# Altium PCB PCB_PI3_v0.1.PcbDoc
Units mm, origin at the board's own origin, x right, y up, seen from the top; angles counter-clockwise.
Board outline 210 x 100 mm, 2 copper layers (Top Layer, Bottom Layer); 65 components, 64 nets, 276 pads, 2 vias.
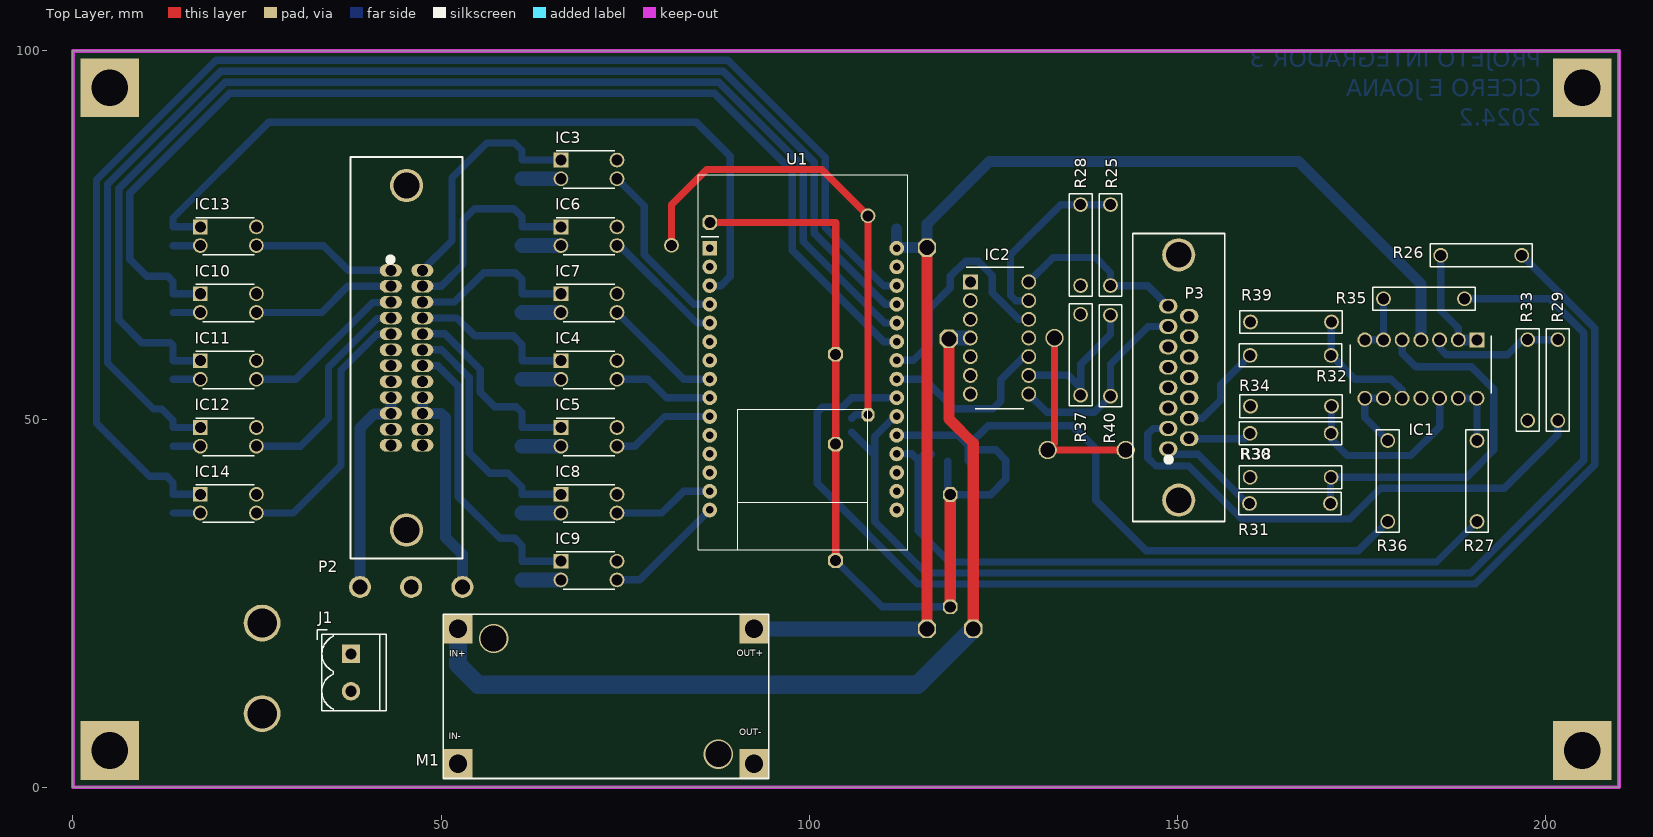
[diagram p0: Top Layer view]
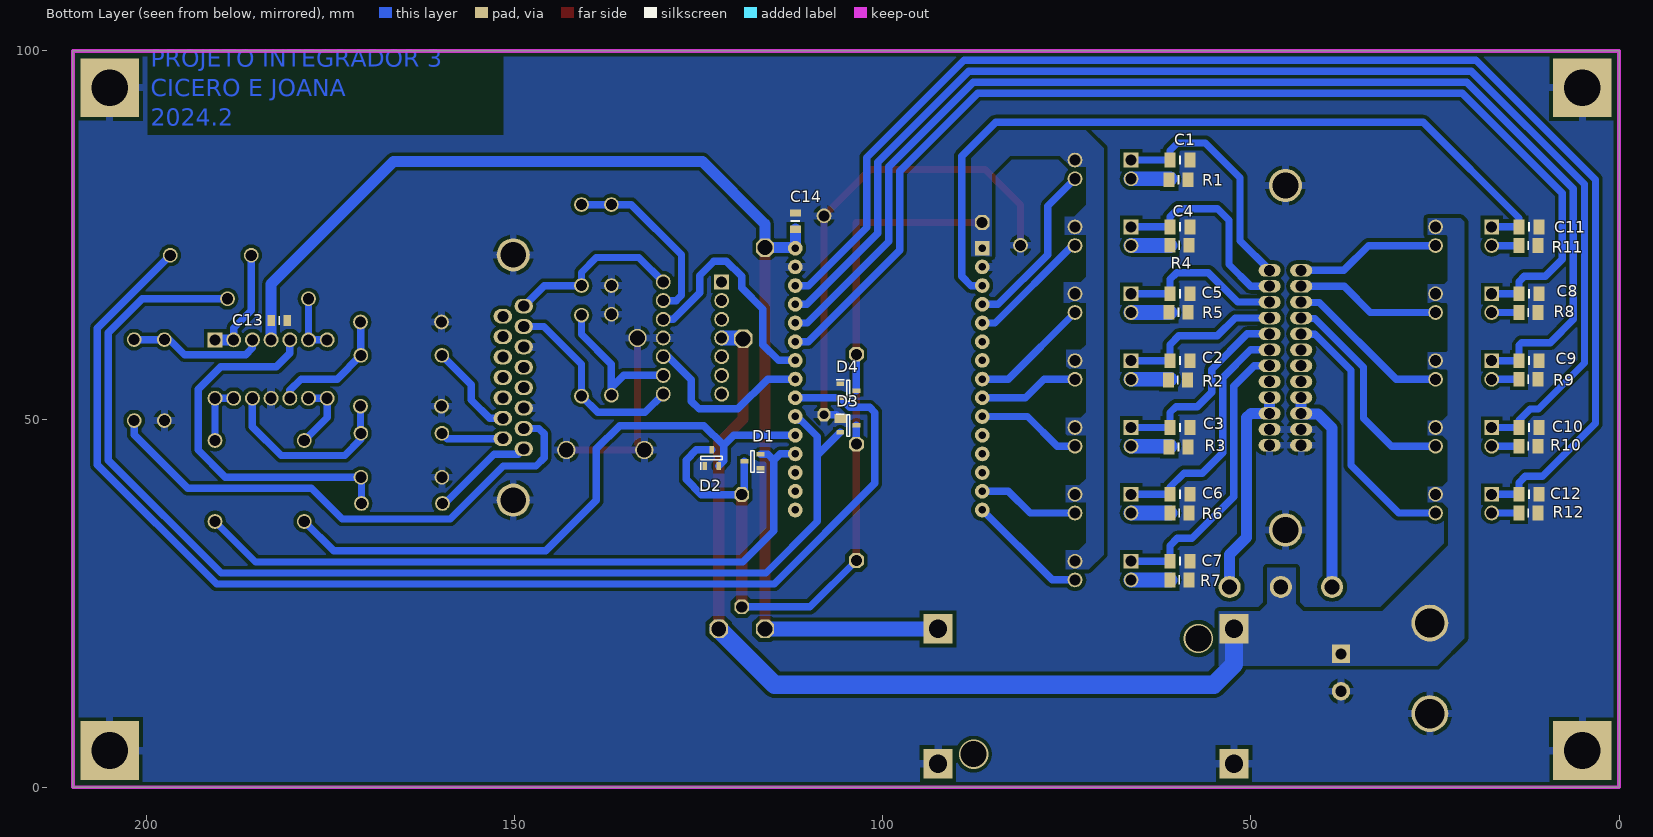
[diagram p1: Bottom Layer view, seen from below]
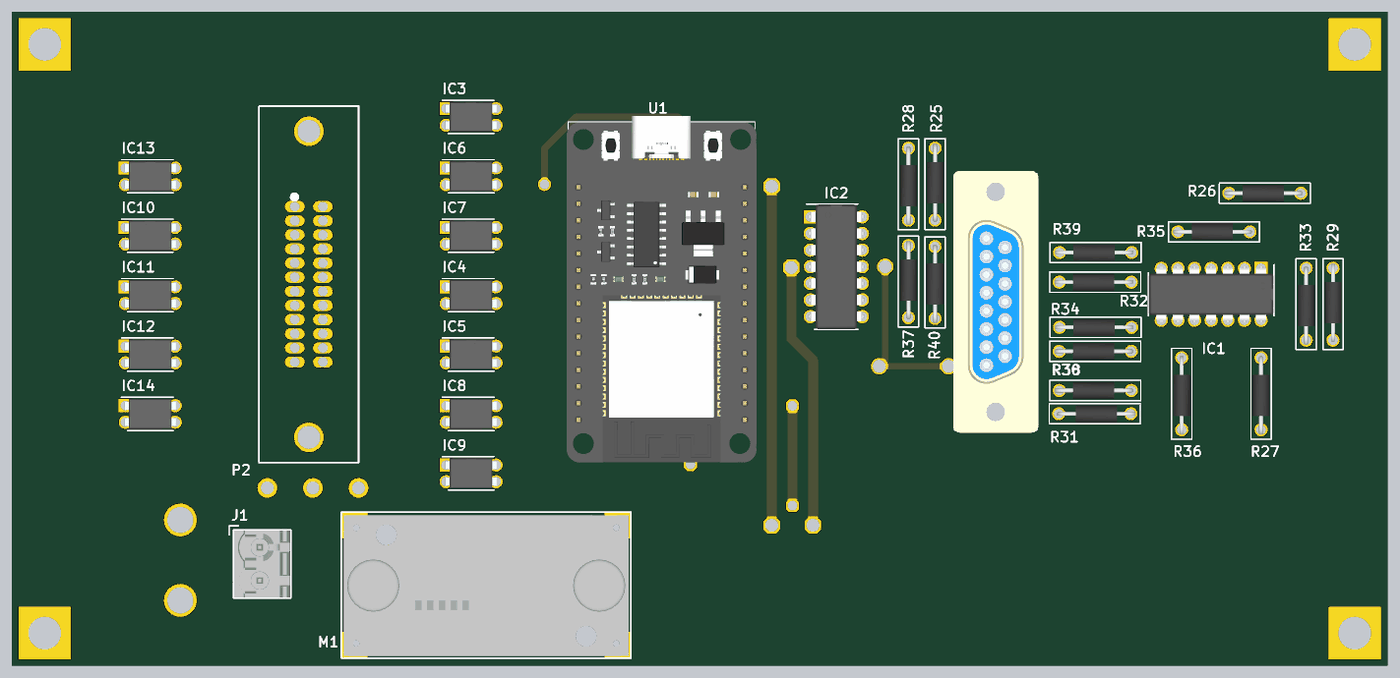
[diagram p2: 3D render of the assembled board from above, using the file's embedded part models]
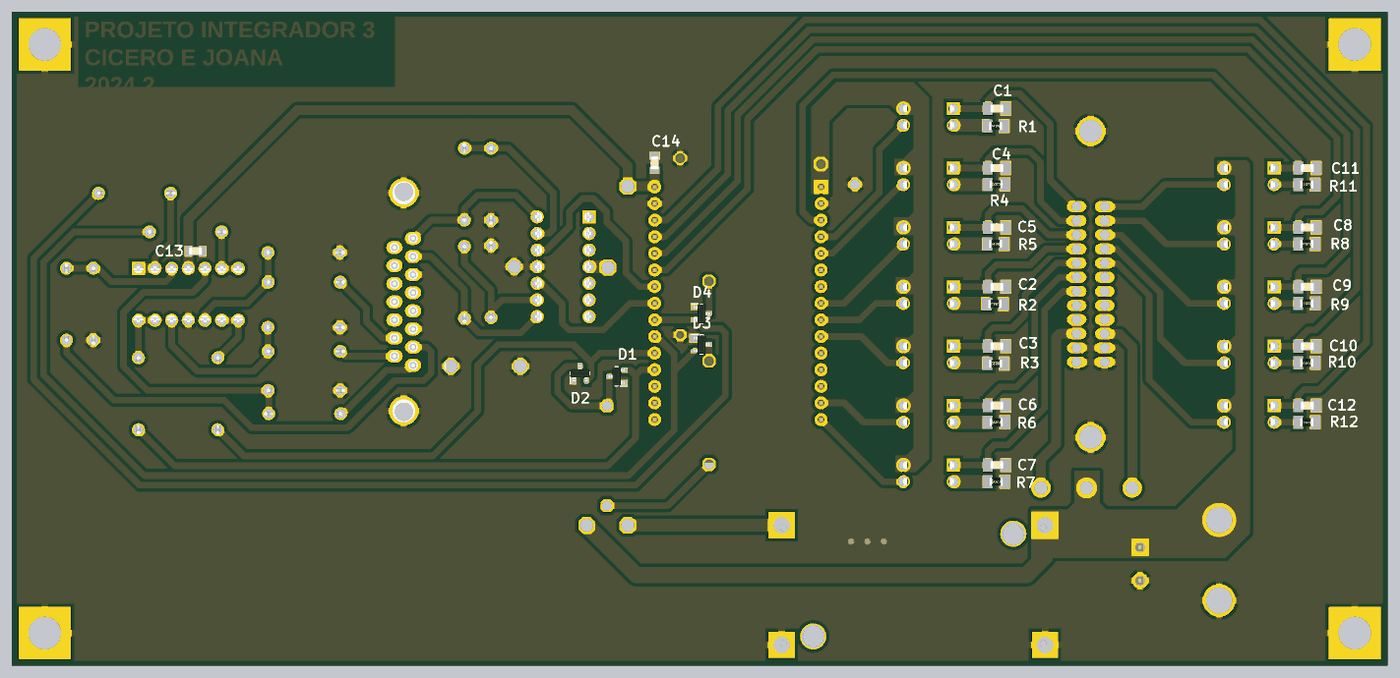
[diagram p3: 3D render of the assembled board from below, using the file's embedded part models]

## Layer stack, top to bottom
Top Solder: solder mask 0.0102, Solder Resist, Dk 3.5
Top Layer: signal copper 0.0356
Dielectric 1: dielectric 0.32, FR-4, Dk 4.8
Bottom Layer: signal copper 0.0356
Bottom Solder: solder mask 0.0102, Solder Resist, Dk 3.5

## Board outline
0,0 0,100 210,100 210,0

## Design rules (kind name [scope] priority, off if disabled: settings)
Clearance [All] p1: gap=0.5 ignorepadtopadclearanceinfootprint=FALSE
HoleSize [All] p1: absolutevalues=TRUE maxlimit=3 minlimit=2 maxpercent=80.000 minpercent=20.000
PlaneClearance [All] p1: clearance=1
PlaneClearance PlaneClearance_GND [All] p2: clearance=1
PlaneConnect [All] p1: planeconnectstyle=Direct reliefexpansion=0.7 reliefentries=4 reliefconductorwidth=1 reliefairgap=1
PolygonConnect PolygonConnect_24 [InNet('24V')] p1: connectstyle=Direct reliefconductorwidth=1.5 reliefentries=4 polygonreliefangle="90 Angle" airgapwidth=1
PolygonConnect PolygonConnect_3V3 [InNet('3.3V')] p2: connectstyle=Direct reliefconductorwidth=1.5 reliefentries=4 polygonreliefangle="90 Angle" airgapwidth=1
PolygonConnect [All] p3: thpad.connectstyle=Relief thpad.reliefconductorwidth=1 thpad.reliefentries=4 thpad.polygonreliefangle="90 Angle" thpad.airgapwidth=0.5 smdpad.connectstyle=Direct smdpad.reliefconductorwidth=1 smdpad.reliefentries=4 smdpad.polygonreliefangle="90 Angle" smdpad.airgapwidth=0.5 via.connectstyle=Relief via.reliefconductorwidth=1 via.reliefentries=4 via.polygonreliefangle="90 Angle" via.airgapwidth=0.5
RoutingVias [All] p1: holewidth=1 width=1.5 viastyle="Through Hole" minholewidth=1 minwidth=1.5 maxholewidth=1.5 maxwidth=2.5
SilkToSilkClearance [All] p1: silktosilkclearance=1
SolderMaskExpansion [All] p1: expansion=0.102
UnRoutedNet [All] p1: checkbadconnections=TRUE
Width [All] p1: maxlimit=2.5 minlimit=1 preferedwidth=1.5
25 further rules are at their usual default settings.

## Components (designator, comment, footprint, x,y, rotation, side; value= is the part's Value field where it differs from the comment)
C1 "10nF" 0805C#1 58.532,85.179 r0 bottom
C2 "10nF" 0805C#1 58.532,57.937 r0 bottom
C3 "10nF" 0805C#1 58.532,48.857 r0 bottom
C4 "10nF" 0805C#1 58.532,76.098 r0 bottom
C5 "10nF" 0805C#1 58.532,67.018 r0 bottom
C6 "10nF" 0805C#1 58.532,39.776 r0 bottom
C7 "10nF" 0805C#1 58.532,30.696 r0 bottom
C8 "10nF" 0805C#1 11.137,67.018 r0 bottom
C9 "10nF" 0805C#1 11.137,57.937 r0 bottom
C10 "10nF" 0805C#1 11.137,48.857 r0 bottom
C11 "10nF" 0805C#1 11.137,76.098 r0 bottom
C12 "10nF" 0805C#1 11.137,39.776 r0 bottom
C13 "100nF" 0805C#2 180.881,63.389 r0 bottom
C14 "100nF" 0805C#2 111.883,77.989 r270 bottom
D1 "BAT54S,215" SOT95P230X110-3N#1 117.7,44.25 r0 bottom
D2 "BAT54S,215" SOT95P230X110-3N#1 123.251,44.717 r90 bottom
D3 "BAT54S,215" SOT95P230X110-3N#2 104.683,49.139 r180 bottom
D4 "BAT54S,215" SOT95P230X110-3N#1 104.683,53.839 r180 bottom
IC1 "LM324N_NOPB" DIP794W56P254L1905H533Q14N 183.081,56.794 r270 top
IC2 "LM324N_NOPB" DIP794W56P254L1905H533Q14N 125.851,61.013 r0 top
IC3 "PC817C" DIP762W60P254L458H450Q4N 70.089,83.909 r0 top
IC4 "PC817C" DIP762W60P254L458H450Q4N 70.089,56.667 r0 top
IC5 "PC817C" DIP762W60P254L458H450Q4N 70.089,47.587 r0 top
IC6 "PC817C" DIP762W60P254L458H450Q4N 70.089,74.828 r0 top
IC7 "PC817C" DIP762W60P254L458H450Q4N 70.089,65.748 r0 top
IC8 "PC817C" DIP762W60P254L458H450Q4N 70.089,38.506 r0 top
IC9 "PC817C" DIP762W60P254L458H450Q4N 70.089,29.426 r0 top
IC10 "PC817C" DIP762W60P254L458H450Q4N 21.111,65.748 r0 top
IC11 "PC817C" DIP762W60P254L458H450Q4N 21.111,56.667 r0 top
IC12 "PC817C" DIP762W60P254L458H450Q4N 21.111,47.587 r0 top
IC13 "PC817C" DIP762W60P254L458H450Q4N 21.111,74.828 r0 top
IC14 "PC817C" DIP762W60P254L458H450Q4N 21.111,38.506 r0 top
J1 "BR8_1x2_M" BR8_1X2_M 37.763,18.108 r270 top
M1 "Module LM2596" MOD_LM2596 94.501,23.494 r0 top
P2 "Connector 2x12 180°" DS1039 45.317,81.724 r270 top
P3 "DB15_2x8x7" DS1033 150.19,55.646 r90 top
R1 "10K" 0805R 58.738,82.5 r0 bottom
R2 "10K" 0805R 58.838,55.3 r0 bottom
R3 "10K" 0805R 58.738,46.2 r0 bottom
R4 "10K" 0805R 58.638,73.6 r0 bottom
R5 "10K" 0805R 58.738,64.5 r0 bottom
R6 "10K" 0805R 58.634,37.236 r0 bottom
R7 "10K" 0805R 58.634,28.156 r0 bottom
R8 "10K" 0805R 11.239,64.478 r0 bottom
R9 "10K" 0805R 11.239,55.397 r0 bottom
R10 "10K" 0805R 11.239,46.317 r0 bottom
R11 "10K" 0805R 11.239,73.558 r0 bottom
R12 "10K" 0805R 11.239,37.236 r0 bottom
R25 "10k" RESISTOR 140.928,79.129 r270 top
R26 "100" RESISTOR 185.783,72.239 r0 top value="100 Ohm"
R27 "100" RESISTOR 190.701,36.093 r90 top value="100 Ohm"
R28 "4K7" RESISTOR 136.864,68.129 r90 top
R29 "68K" RESISTOR 201.683,60.789 r270 top
R30 "68K" RESISTOR 159.889,48.069 r0 top
R31 "68K" RESISTOR 170.811,38.538 r180 top
R32 "68K" RESISTOR 159.889,58.649 r0 top
R33 "33K" RESISTOR 197.583,49.789 r90 top
R34 "33K" RESISTOR 159.938,51.746 r0 top
R35 "100" RESISTOR 178.001,66.339 r0 top value="100 Ohm"
R36 "100" RESISTOR 178.583,36.089 r90 top value="100 Ohm"
R37 "4K7" RESISTOR 136.864,64.238 r270 top
R38 "33K" RESISTOR 159.889,42.094 r0 top
R39 "33K" RESISTOR 159.938,63.176 r0 top
R40 "10k" RESISTOR 140.928,53.111 r90 top
U1 "ESP32 DevKit V01" ESP32-DEVKIT-V1 86.483,73.209 r0 top

## Footprints (in the part's own frame and the unit in brackets; to place one, negate y for a bottom-side part, rotate by r counter-clockwise, add the part's x,y. Pads: shape width x height; smd on the part's side, far side on the other; paste and mask are expansions set on the pad)
0805C#1 [mm] "Chip Capacitor Ceramic; Body 2 x 1.3 mm (LxW typ)"
  rect 1.5x2 smd: 1(-0.254,0) 2(2.464,0)
  silkscreen extent 0.97,-0.64 1.23,0.61, body extent 0.1,-0.64 2.1,0.62, height 0.81
0805C#2 [mm] "Chip Capacitor Ceramic; Body 2 x 1.3 mm (LxW typ)"
  rect 1x1.5 smd: 1(0,0) 2(2.2,0)
  silkscreen extent 0.97,-0.64 1.23,0.61, body extent 0.1,-0.64 2.1,0.61, height 0.81
0805R [mm] "Chip Resistor; Body 2 x 1.3 mm (LxW typ)"
  rect 1.5x2 smd: 1(-0.203,0) 2(2.362,0)
  silkscreen extent 0.97,-0.63 1.23,0.61, body extent 0.1,-0.64 2.1,0.62, height 0.52
BR8_1X2_M [mm] "BR8 Metaltex connector, 1x2, male, 180°"
  rect 2.5x2.5 hole 1.5: 1(0,0)
  round 2.5 hole 1.5: 2(5.08,0)
  silkscreen extent -3.3,-4.6 7.75,4.8, body extent -2.54,-3.84 7.62,4.66, height 12
DIP762W60P254L458H450Q4N [mm]
  rect 2x2 hole 1.5: 1(-3.81,1.27)
  round 2 hole 1.5: 2(-3.81,-1.27) 3(3.81,-1.27) 4(3.81,1.27)
  silkscreen extent -4.41,-2.54 3.5,2.54, body extent -3.96,-2.29 3.96,2.29, height 4.5
DIP794W56P254L1905H533Q14N [mil]
  rect 80x80 hole 59.05: 1(-156.26,300)
  round 80 hole 59.05: 2(-156.26,200) 3(-156.26,100) 4(-156.26,0) 5(-156.26,-100) 6(-156.26,-200) 7(-156.26,-300) 8(156.26,-300) 9(156.26,-200) 10(156.26,-100) 11(156.26,0) 12(156.26,100) 13(156.26,200) 14(156.26,300)
  silkscreen extent -179,-377 130,377, body extent -167,-375 167,375, height 172
DS1033 [mm] "Connector DS1039 Connfly"
  oval 2x2.5 hole 1.5: 1(9.695,1.42) 2(6.925,1.42) 3(4.155,1.42) 4(1.385,1.42) 5(-1.385,1.42) 6(-4.155,1.42) 7(-6.925,1.42) 8(-9.695,1.42) 9(8.31,-1.42) 10(5.54,-1.42) 11(2.77,-1.42) 12(0,-1.42) 13(-2.77,-1.42) 14(-5.54,-1.42) 15(-8.31,-1.42)
  round 4.5 hole 3.5: 6(-16.66,0) 6(16.66,0)
  silkscreen extent -19.57,-6.25 19.57,6.25, body extent -20,-6.5 20,6.5, height 12
DS1039 [mm] "Connector DS1039 Connfly"
  oval 1.7x3 hole 1.5: 1(11.52,-2.145) 2(13.68,-2.145) 3(15.84,-2.145) 4(18,-2.145) 5(20.16,-2.145) 6(22.32,-2.145) 7(24.48,-2.145) 8(26.64,-2.145) 9(28.8,-2.145) 10(30.96,-2.145) 11(33.12,-2.145) 12(35.28,-2.145) 13(11.52,2.145) 14(13.68,2.145) 15(15.84,2.145) 16(18,2.145) 17(20.16,2.145) 18(22.32,2.145) 19(24.48,2.145) 20(26.64,2.145) 21(28.8,2.145) 22(30.96,2.145) 23(33.12,2.145) 24(35.28,2.145)
  round 4.5 hole 3.5: 24(0,0) 24(46.8,0)
  silkscreen extent -3.85,-7.6 50.65,7.6, body extent -3.83,-7.55 50.7,7.47, height 10
ESP32-DEVKIT-V1 [mm] "Mod ESP32 DEVKIT V1 DOIT"
  rect 2x2 / inner round 2 / far side rect 2x2 hole 1.02: 1(0,0)
  round 2 hole 1.02: 2(0,-2.54) 3(0,-5.08) 4(0,-7.62) 5(0,-10.16) 6(0,-12.7) 7(0,-15.24) 8(0,-17.78) 9(0,-20.32) 10(0,-22.86) 11(0,-25.4) 12(0,-27.94) 13(0,-30.48) 14(0,-33.02) 15(0,-35.56) 16(25.4,-35.56) 17(25.4,-33.02) 18(25.4,-30.48) 19(25.4,-27.94) 20(25.4,-25.4) 21(25.4,-22.86) 22(25.4,-20.32) 23(25.4,-17.78) 24(25.4,-15.24) 25(25.4,-12.7) 26(25.4,-10.16) 27(25.4,-7.62) 28(25.4,-5.08) 29(25.4,-2.54) 30(25.4,0)
  silkscreen extent -1.58,-40.99 26.93,9.96, body extent -1.81,-42.12 27.19,10.85, height 18.36
MOD_LM2596 [mm] "Module LM2596 Regulator DC-DC"
  rect 4x4 hole 2.5: 1(-42.2,-2) 2(-42.2,-20.3) 3(-2,-2) 4(-2,-20.3)
  silkscreen extent -44.2,-22.3 0,0, body extent -43.85,-21.98 -0.35,-0.48, height 12.1
RESISTOR [mm] "RESISTOR PTH"
  round 2 hole 1.5: 1(0,0) 2(11,0)
  silkscreen extent -1.45,-1.55 12.45,1.55, body extent -0.77,-1.3 11.29,1.32, height 2.61
SOT95P230X110-3N#1 [mm]
  rect 1.05x0.6 smd: 1(-1.1,0.95) 2(-1.1,-0.95) 3(1.1,0)
  silkscreen extent -1.63,-1.45 0.23,1.5, body extent -1.2,-1.45 1.2,1.45, height 0.95
SOT95P230X110-3N#2 [mm]
  rect 1.5x1.2 smd: 1(-1.1,0.95)
  rect 1.05x0.6 smd: 2(-1.1,-0.95) 3(1.1,0)
  silkscreen extent -1.63,-1.45 0.23,1.5, body extent -1.2,-1.45 1.2,1.45, height 0.95

## Part data
C1 C2 C3 C4 C5 C6 C7 C8 C9 C10 C11 C12: library part C_10nF_0805, "CAP CER 10nF 50V X7R 0805", JLCPCB_Part=C1710, Max_Tolerance_Allowed=10%, Package=0805, Temperature_Coefficient=X7R, Voltage=50V, Type=Ceramic
C13 C14: library part C_100nF_0805, "CAP CER 100nF 50V X7R 0805", JLCPCB_Part=C49678, Max_Tolerance_Allowed=10%, Package=0805, Temperature_Coefficient=X7R, Voltage=50V, Type=Ceramic
D1 D2 D3 D4: "Schottky Diode", Manufacturer_Name=Nexperia, Mouser Part Number=771-BAT54S-T/R, Arrow Part Number=BAT54S,215, Arrow Price/Stock=https://www.arrow.com/en/products/bat54s215/nexperia?region=europe, Datasheet Link=https://assets.nexperia.com/documents/data-sheet/BAT54S.pdf, Height=1.1mm, Manufacturer_Part_Number=BAT54S,215, Mouser Price/Stock=https://www.mouser.co.uk/ProductDetail/Nexperia/BAT54S215?qs=me8TqzrmIYVOaf3j7zH0Wg%3D%3D
IC1 IC2: "Integrated Circuit", Arrow Part Number=LM324N/NOPB, Manufacturer_Name="Texas Instruments", Mouser Part Number=926-LM324N/NOPB, Arrow Price/Stock=https://www.arrow.com/en/products/lm324nnopb/texas-instruments?utm_currency=USD&region=nac, Datasheet Link=http://www.ti.com/general/docs/lit/getliterature.tsp?genericPartNumber=LM324-N&fileType=pdf&HQS=ti-null-null-sf-df-pf-sep-wwe&DCM=yes, Height=5.334mm, Manufacturer_Part_Number=LM324N/NOPB, Mouser Price/Stock=https://www.mouser.co.uk/ProductDetail/Texas-Instruments/LM324N-NOPB?qs=X1J7HmVL2ZGOUbLumEeh2Q%3D%3D
IC3 IC4 IC5 IC6 IC7 IC8 IC9 IC10 IC11 IC12 IC13 IC14: "Integrated Circuit", Manufacturer_Name="Sharp Microelectronics", Datasheet Link=https://datasheet.datasheetarchive.com/originals/distributors/Datasheets-31/DSA-613071.pdf, Height=4.5mm, Manufacturer_Part_Number=PC817C
J1: "BR8 Metaltex connector, 1x2, male, 180°", Current=15A, Manufacturer_Part=BR8MC1-02, Voltage=300V, Datasheet=https://www.metaltex.com.br/assets/produtos/pdf/br8.pdf, ML_Part=CPE08001, Pitch=5,08mm, Positions=2, Row=1, Type="Male 180°"
M1: library part Mod_Header_LM2596, "LM2596 4 Pins", Length=11,2mm, Module_Description=LM2596, Pitch=2,54mm
P2: library part Connector_2x12_F, "Connector DS1078 Female, 180°, 2 Lines, 12 Columns, 24 Pins", Length=11,2mm
P3: library part Connector_2x7e8_F, "Connector DB15 female, 180º, 2 Lines, 7e8 Columns, 26 Pins", Length=11.2mm
R1 R2 R3 R4 R5 R6 R7 R8 R9 R10 R11 R12: library part R_10K_0805, "RES 10K OHM 5% 1/8W 0805", JLCPCB_Part=C17414, Max_Tolerance_Allowed=5%, Min_Power_Allowed="1/8 W", Package=0805
R25 R40: library part R_10k, "RES 10k OHM 5% 1/8W", JLCPCB_Part=C17513, Max_Tolerance_Allowed=5%, Min_Power_Allowed="1/8 W"
R26 R27 R35 R36: library part R_0R100, "RES 100 OHM 5% 1/8", Max_Tolerance_Allowed=1%, Min_Power_Allowed="1/8 W"
R28 R37: library part R_4K7, "RES 4K7 OHM 5% 1/8W", JLCPCB_Part=C17513, Max_Tolerance_Allowed=5%, Min_Power_Allowed="1/8 W"
R29 R30 R31 R32: library part R_68K, "RES 68K OHM 5% 1/8W", JLCPCB_Part=C17513, Max_Tolerance_Allowed=5%, Min_Power_Allowed="1/8 W"
R33 R34 R38 R39: library part R_33K, "RES 33K OHM 5% 1/8W", JLCPCB_Part=C17513, Max_Tolerance_Allowed=5%, Min_Power_Allowed="1/8 W"
U1: library part ESP32_DEVKIT, "IC MCU 32BIT ESP32 DEVKIT V01", Manufacturer_Name=Doit, Manufacturer_Part_Number=ESP-32-DEVKIT-V1, Voltage=3.3V, Datasheet=https://roboeq.ir/files/id/4034/name/ESP32%20MODULE.pdf/, Height=4.5mm, ML_Part=CPE11011

## Free pads (board coordinates)
  rect 8x8 hole 5: 1(5,5) 1(5,95) 1(205,5) 1(205,95)
  round 2 hole 1.5: 2(81.3,73.6) 2(107.983,77.6)
  oct 2x2 hole 1.5: 2(86.5,76.7) 2(103.583,30.789) 2(103.583,46.589) 2(103.583,58.789) 2(119.158,24.489) 2(119.158,39.739)
  oct 1.8x1.8 hole 1.2: 2(107.983,50.589)
  oct 2.5x2.5 hole 2: 2(116.001,21.494) 2(116.001,73.294) 2(118.983,60.889) 2(122.283,21.494)
  round 2.5 hole 2: 2(132.392,45.794) 2(133.32,61.013) 2(142.983,45.794)
  round 5 hole 4: 3(25.7,22.3) 4(25.7,10)
  round 3 hole 2: 3(38.981,27.194) 3(45.941,27.194) 3(52.901,27.194)

## Via types
v1: diameter 4, hole 3.5, Top Layer to Bottom Layer, 2 vias

## Nets (pads, with @x,y where several pads share a name; then routed paths per layer and width w, separated by ;. In a path a pad name is that pad's centre, name@x,y a point inside that pad or via, vN(x,y) a via of type N, cw(c..) or ccw(c..) an arc to the next point about the centre after c; other vN are vias at no path point)
3.3V: D1.3 D2.3 D3.3 D4.3 IC3.4 IC4.4 IC5.4 IC6.4 IC7.4 IC8.4 IC9.4 pad.2@86.5,76.7 pad.2@103.583,30.789 pad.2@103.583,46.589 pad.2@103.583,58.789 pad.2@119.158,24.489 pad.2@119.158,39.739 U1.1 | length 123.7
  Top Layer w1: pad.2@86.5,76.7 103.583,76.7 103.583,58.789 103.583,46.589 pad.2@103.583,30.789
  Top Layer w1.5: pad.2@119.158,24.489 pad.2@119.158,39.739
  Bottom Layer w1: pad.2@103.583,30.789 109.883,24.489 pad.2@119.158,24.489 ; pad.2@103.583,46.589 D3.3 ; D4.3 pad.2@103.583,58.789 ; D1.3 118.8,40.097 119.158,39.739 124.646,39.739 126.72,41.813 126.72,44.413 125.317,45.817 D2.3
5V: C13.2 C14.2 IC1.4 M1.3 pad.2@116.001,21.494 pad.2@116.001,73.294 U1.30 | length 170.3
  Top Layer w1.5: pad.2@116.001,21.494 pad.2@116.001,73.294
  Bottom Layer w1.5: C14.2 U1.30 111.968,73.294 116.001,73.294 116.001,76.457 124.507,84.963 166.459,84.963 183.081,68.341 C13.2 IC1.4
  Bottom Layer w2: M1.3 pad.2@116.001,21.494
24V: IC2.4 IC10.4 IC11.4 IC12.4 IC13.4 IC14.4 J1.1 M1.1 pad.2@118.983,60.889 pad.2@122.283,21.494 pad.3@25.7,22.3 pad.3@45.941,27.194 | length 122.8
  Top Layer w1.5: pad.2@118.983,60.889 118.983,50.017 122.283,46.717 pad.2@122.283,21.494
  Bottom Layer w2: pad.2@118.983,60.889 119.107,61.013 IC2.4 IC2.4@121.858,60.989
  Bottom Layer w2.5: M1.1 52.301,16.671 55.078,13.894 114.683,13.894 pad.2@122.283,21.494
24VA: P2.9 P2.10 pad.3@38.981,27.194 | length 28.8
  Bottom Layer w1.5: pad.3@38.981,27.194 38.981,48.792 40.893,50.704 43.112,50.704 P2.10 P2.9
24VB: P2.21 P2.22 pad.3@52.901,27.194 | length 29.5
  Bottom Layer w1.5: P2.21 P2.22 50.014,50.764 50.583,50.194 50.583,33.894 52.901,31.576 pad.3@52.901,27.194
B102: IC3.3 U1.4 | length 23.5
  Bottom Layer w1: IC3.3 77.6,78.938 77.6,72.338 84.349,65.589 U1.4
B113: IC4.3 U1.9 | length 13.6
  Bottom Layer w1: IC4.3 78.103,55.397 80.611,52.889 U1.9
B114: IC5.3 U1.10 | length 14.3
  Bottom Layer w1: IC5.3 76.317,46.317 80.349,50.349 U1.10
E104: C8.2 IC10.1 U1.25 | length 151.5
  Bottom Layer w1: IC10.1 C8.2 13.601,68.655 12.856,69.399 10.019,69.399 7.7,71.718 7.7,80.651 21.299,94.25 87.104,94.25 97.701,83.653 97.701,72.917 110.109,60.509 U1.25
FIC_B102: D4.2 R26.2 U1.22 | length 171.8
  Bottom Layer w1: U1.22 D4.2 104.483,51.589 101.783,51.589 101.083,50.889 101.083,41.279 114.768,27.594 190.488,27.594 206.683,43.789 206.683,62.34 R26.2
GND: C1.1 C2.1 C3.1 C4.1 C5.1 C6.1 C7.1 C8.1 C9.1 C10.1 C11.1 C12.1 C13.1 C14.1 D1.1 D2.1 D3.1 D4.1 IC1.11 IC2.11 J1.2 M1.2 M1.4 P2.11 P2.12 P2.23 P2.24 P3.3 P3.6 pad.1 pad.2@81.3,73.6 pad.2@107.983,50.589 pad.2@107.983,77.6 pad.2@132.392,45.794 pad.2@133.32,61.013 pad.2@142.983,45.794 pad.4 R1.1 R2.1 R3.1 R4.1 R5.1 R6.1 R7.1 R8.1 R9.1 R10.1 R11.1 R12.1 R28.1 R33.1 R34.1 R37.1 R38.1 R39.1 U1.2 U1.29 | length 92.4
  Top Layer w1: pad.2@81.3,73.6 81.3,79.1 86.1,83.9 101.683,83.9 107.983,77.6 pad.2@107.983,50.589 ; pad.2@133.32,61.013 133.32,46.723 132.392,45.794 pad.2@142.983,45.794
  Bottom Layer w1: D3.1 106.283,50.589 pad.2@107.983,50.589
IN_B102: C1.2 IC3.1 P2.13 | length 32.7
  Bottom Layer w1: P2.13 51.483,74.224 51.483,82.794 56.183,87.494 59.983,87.494 60.996,86.481 C1.2 IC3.1
IN_B113: C2.2 IC4.1 P2.16 | length 22.5
  Bottom Layer w1: P2.16 52.154,63.724 54.583,61.294 59.783,61.294 60.996,60.081 C2.2 IC4.1
IN_B114: C3.2 IC5.1 P2.17 | length 27.1
  Bottom Layer w1: P2.17 50.501,61.564 55.333,56.731 55.333,53.644 57.283,51.694 60.183,51.694 60.996,50.881 C3.2 IC5.1
IN_FIC_B102: P3.7 R29.2 | length 72.1
  Bottom Layer w1: P3.7 146.714,48.721 145.983,47.989 145.983,44.735 147.101,43.617 151.555,43.617 158.755,36.417 173.411,36.417 177.588,40.594 194.388,40.594 201.683,47.889 R29.2
IN_LIC_B101: P3.8 R31.2 | length 14.1
  Bottom Layer w1: P3.8 149.504,45.217 152.808,45.217 159.486,38.538 R31.2
IN_PIC_B103: P3.15 R30.1 | length 8.6
  Bottom Layer w1: P3.15 159.156,47.336 R30.1
IN_S111: C4.2 IC6.1 P2.14 | length 28.5
  Bottom Layer w1: P2.14 50.038,68.044 52.983,70.989 52.983,76.989 54.583,78.589 59.883,78.589 60.996,77.476 C4.2 IC6.1
IN_S112: C5.2 IC7.1 P2.15 | length 22.8
  Bottom Layer w1: P2.15 47.473,65.894 51.783,65.894 55.783,69.894 60.083,69.894 60.996,68.981 C5.2 IC7.1
IN_S115: C6.2 IC8.1 P2.18 | length 33.5
  Bottom Layer w1: P2.18 50.061,59.404 53.833,55.631 53.833,45.431 56.601,42.663 59.101,42.663 60.996,40.768 C6.2 IC8.1
IN_S116: C7.2 IC9.1 P2.19 | length 39.8
  Bottom Layer w1: P2.19 49.534,57.244 52.333,54.444 52.333,39.467 58.006,33.794 60.006,33.794 60.996,32.804 C7.2 IC9.1
IN_TIC_B104: P3.14 R32.1 | length 13
  Bottom Layer w1: P3.14 153.395,50.106 155.883,52.594 155.883,54.643 R32.1
K1: C9.2 IC11.1 U1.26 | length 163.6
  Bottom Layer w1: IC11.1 C9.2 13.601,60.019 13.237,60.382 9.336,60.382 6.2,63.518 6.2,81.273 20.677,95.75 87.725,95.75 99.201,84.274 99.201,74.117 110.269,63.049 U1.26
LIC_B101: D3.2 R35.2 U1.21 | length 161.3
  Bottom Layer w1: D3.2 108.883,45.089 ; U1.21 111.343,49.809 111.055,49.809 108.883,47.638 108.883,45.089 ; R35.2@188.683,66.339 R35.2 200.562,66.339 205.183,61.718 205.183,44.411 189.867,29.094 115.868,29.094 108.883,36.079 108.883,45.089
M1: C10.2 IC12.1 U1.27 | length 173.4
  Bottom Layer w1: IC12.1 C10.2 13.601,49.843 12.079,51.365 10.953,51.365 4.7,57.618 4.7,81.894 20.056,97.25 88.347,97.25 100.701,84.895 100.701,75.217 110.329,65.589 U1.27
M102: C11.2 IC13.1 U1.3 | length 107.6
  Bottom Layer w1: IC13.1 C11.2 13.601,77.316 26.601,90.317 84.683,90.317 89.3,85.7 89.3,69.4 88.029,68.129 U1.3
M106: C12.2 IC14.1 U1.28 | length 185.8
  Bottom Layer w1: IC14.1 C12.2 13.601,41.35 12.729,42.221 10.397,42.221 3.2,49.418 3.2,82.515 19.435,98.75 88.968,98.75 102.201,85.517 102.201,76.017 110.089,68.129 U1.28
NetIC1_1: IC1.1 IC1.2 R26.1 | length 15
  Bottom Layer w1: R26.1 185.783,64.739 188.161,62.361 IC1.2
  Bottom Layer w1.5: IC1.2 IC1.1
NetIC1_3: IC1.3 R29.1 R33.2 | length 18.4
  Bottom Layer w1: IC1.3 185.621,59.656 186.53,58.747 194.841,58.747 196.883,60.789 R33.2 R29.1
NetIC1_5: IC1.5 R31.1 R38.2 | length 51.8
  Bottom Layer w1: R31.1 170.811,42.016 R38.2 189.288,42.094 192.987,45.794 192.987,54.032 189.93,57.089 182.383,57.089 180.541,58.931 IC1.5
NetIC1_6: IC1.6 IC1.7 R35.1 | length 8.1
  Bottom Layer w1: IC1.7 IC1.6 R35.1
NetIC1_8: IC1.8 IC1.9 R36.2 | length 9.6
  Bottom Layer w1: IC1.9 IC1.8 175.461,50.211 R36.2
NetIC1_10: IC1.10 R32.2 R39.2 | length 17.2
  Bottom Layer w1: R39.2 170.889,63.127 R32.2 174.109,55.429 179.017,55.429 180.541,53.905 IC1.10
NetIC1_12: IC1.12 R30.2 R34.2 | length 25.6
  Bottom Layer w1: R34.2 170.938,48.118 R30.2 170.889,47.273 173.103,45.059 181.703,45.059 185.621,48.977 IC1.12
NetIC1_13: IC1.13 IC1.14 R27.2 | length 8.3
  Bottom Layer w1: IC1.13 IC1.14 R27.2
NetIC2_9: IC2.9 R37.2 R40.2 | length 20.3
  Bottom Layer w1: IC2.9 135.189,55.933 136.864,54.258 ; R37.2 136.864,54.258 ; R40.2 140.928,61.525 136.864,57.461 136.864,54.258
NetIC2_13: IC2.13 R25.1 R28.2 | length 24.7
  Bottom Layer w1: IC2.13 128.051,66.093 127.351,66.793 127.351,72.307 134.173,79.129 R28.2 R25.1
NetIC3_2: IC3.2 R1.2 | length 5.3
  Bottom Layer w2: R1.2@60.996,82.639 IC3.2
NetIC4_2: IC4.2 R2.2 | length 5.3
  Bottom Layer w2: R2.2@60.996,55.397 IC4.2
NetIC5_2: IC5.2 R3.2 | length 5.3
  Bottom Layer w2: R3.2@60.996,46.317 IC5.2
NetIC6_2: IC6.2 R4.2 | length 5.3
  Bottom Layer w2: R4.2@60.996,73.558 IC6.2
NetIC7_2: IC7.2 R5.2 | length 5.3
  Bottom Layer w2: R5.2@60.996,64.478 IC7.2
NetIC8_2: IC8.2 R6.2 | length 5.3
  Bottom Layer w2: R6.2 IC8.2
NetIC9_2: IC9.2 R7.2 | length 5.3
  Bottom Layer w2: R7.2 IC9.2
NetIC10_2: IC10.2 R8.2 | length 3.7
  Bottom Layer w1: R8.2 IC10.2
NetIC11_2: IC11.2 R9.2 | length 3.7
  Bottom Layer w1: R9.2 IC11.2
NetIC12_2: IC12.2 R10.2 | length 3.7
  Bottom Layer w1: R10.2 IC12.2
NetIC13_2: IC13.2 R11.2 | length 3.7
  Bottom Layer w1: R11.2 IC13.2
NetIC14_2: IC14.2 R12.2 | length 3.7
  Bottom Layer w1: R12.2 IC14.2
OUT_E104: IC10.3 P2.2 | length 20.4
  Bottom Layer w1: IC10.3 33.778,64.478 37.344,68.044 P2.2 P2.2@43.872,68.044
OUT_K1: IC11.3 P2.3 | length 22.6
  Bottom Layer w1: IC11.3 30.286,55.397 40.713,65.824 43.112,65.824 P2.3
OUT_M1: IC12.3 P2.4 | length 30.3
  Bottom Layer w1: IC12.3 30.917,46.317 34.703,50.103 34.703,57.038 41.329,63.664 P2.4@43.172,63.664 ; P2.4 P2.4@43.172,63.664 ; P2.4@43.872,63.664 P2.4@43.172,63.664
OUT_M102: IC13.3 P2.1 | length 19.6
  Bottom Layer w1: IC13.3 34.042,73.558 37.396,70.204 P2.1
OUT_M106: IC14.3 P2.5 | length 35.9
  Bottom Layer w1: IC14.3 29.936,37.236 36.403,43.703 36.403,56.617 41.29,61.504 43.112,61.504 P2.5
OUT_P101: IC2.14 P3.1 R25.2 | length 24.1
  Bottom Layer w1: IC2.14 133.126,71.939 138.901,71.939 140.928,69.912 R25.2 145.982,68.129 P3.1
OUT_V106: IC2.8 P3.2 R40.1 | length 27.3
  Bottom Layer w1: IC2.8 132.3,50.913 138.73,50.913 R40.1 140.928,57.435 146.064,62.571 P3.2
P101: IC2.12 U1.24 | length 31.9
  Bottom Layer w1: U1.24 114.163,57.969 116.283,60.089 116.283,64.939 119.183,67.839 119.183,69.38 121.242,71.439 122.938,71.439 124.883,69.494 124.883,67.139 128.469,63.553 IC2.12
PIC_B103: D1.2 R27.1 U1.19 | length 94.9
  Bottom Layer w1: U1.19 113.931,45.269 114.8,44.4 ; D1.2 115.6,45.2 114.8,44.4 ; R27.1 185.202,30.594 119.006,30.594 114.8,34.8 114.8,44.4
S111: IC6.3 U1.5 | length 16.9
  Bottom Layer w1: IC6.3 74.258,73.558 84.767,63.049 U1.5
S112: IC7.3 U1.8 | length 16.3
  Bottom Layer w1: IC7.3 82.948,55.429 U1.8
S115: IC8.3 U1.14 | length 13.8
  Bottom Layer w1: IC8.3 79.997,37.236 82.95,40.189 U1.14
S116: IC9.3 U1.15 | length 16.5
  Bottom Layer w1: IC9.3 76.99,28.156 U1.15
TIC_B104: D2.2 R36.1 U1.20 | length 84.3
  Bottom Layer w1: U1.20 120.236,47.809 121.62,46.425 ; D2.2 121.62,44.298 121.62,46.425 ; R36.1 174.588,32.094 145.768,32.094 138.898,38.965 138.898,45.965 135.749,49.113 124.309,49.113 121.62,46.425
V106: IC2.10 U1.23 | length 24.3
  Bottom Layer w1: U1.23 115.643,55.429 119.695,51.377 124.965,51.377 126.001,52.413 126.001,55.319 129.156,58.473 IC2.10
pads on no net: IC2.1 IC2.2 IC2.3 IC2.5 IC2.6 IC2.7 P2.6 P2.7 P2.8 P2.20 P3.4 P3.5 P3.9 P3.10 P3.11 P3.12 P3.13 U1.6 U1.7 U1.11 U1.12 U1.13 U1.16 U1.17 U1.18
copper on no net:
  other v1: 87.676,4.494 57.126,20.194

## Polygon pours and split planes (outlines as drawn)
3.3V on Bottom Layer "3.3V_L02_P002" (solid, remove dead copper, pour order 2): 75.153,29.6 72,29.6 70,31.6 70,86.8 72.439,89.239 84.161,89.239 88,85.4 88,72.1 85.183,72.1 85.183,83.239 82.683,85.739 75.939,85.739 74.439,84.239 72.4,84.239 72.4,79.1 74,77.5 75.3,77.5 75.3,75 72.4,75 72.4,69.3 73.1,68.6 75.4,68.6 75.4,65.8 72.4,65.8 72.4,60.1 73.1,59.4 75.1,59.4 75.1,57.2 74.7,56.8 72.4,56.8 72.4,50.9 73.1,50.2 75.153,50.2 75.153,47.997 74.955,47.8 72.4,47.8 72.4,41.9 73.3,41 75.153,41 75.153,38.7 72.4,38.7 72.4,33.2 73.4,32.2 75.153,32.2
24V on Bottom Layer "Top Layer-No Net" (solid, remove dead copper, pour order 0): 54.4,23.9 54.4,16.5 24.7,16.5 21.001,20.199 21.001,76.794 21.501,77.294 26.001,77.294 26.001,75.044 23.501,75.044 23.251,74.794 23.251,68.794 23.751,68.294 26.001,68.294 26.001,65.794 23.501,65.794 23.251,65.544 23.251,59.294 23.501,59.044 26.001,59.044 26.001,56.794 23.501,56.794 23.251,56.544 23.251,50.544 24.001,49.794 26.001,49.794 26.001,47.794 24.001,47.794 23.251,47.044 23.251,41.544 24.001,40.794 26.001,40.794 26.001,38.694 24.001,38.694 23.201,37.894 23.201,32.894 32.195,23.9 42.895,23.9 43.9,24.905 43.9,29.8 47.8,29.8 47.8,24.9 48.8,23.9
GND on Bottom Layer "GND_L02_P004" (solid, remove dead copper, pour order 4): 0.383,100.102 0.383,0 210,0 210,100.102

## Keep-outs
Keep-Out Layer:
  the board outline again, w0.5

## Other copper
Bottom Layer:
  text "PROJETO INTEGRADOR 3 / CICERO E JOANA / 2024.2" at 199.401,89.017 h4

## Text inside footprints (layer, text, board x,y; h text height)
M1: Top Overlay "OUT-" at 90.526,6.694 h1.52; Top Overlay "OUT+" at 90.176,17.419 h1.52; Top Overlay "IN+" at 51.126,17.344 h1.52; Top Overlay "IN-" at 51.076,6.144 h1.52